# Altium PCB RightEar.PcbDoc
Units mm, origin at the board's own origin, x right, y up, seen from the top; angles counter-clockwise.
Board outline 72 x 100 mm, 2 copper layers (Top Layer, Bottom Layer); 1 components, 1 nets, 16 pads, 2 vias.
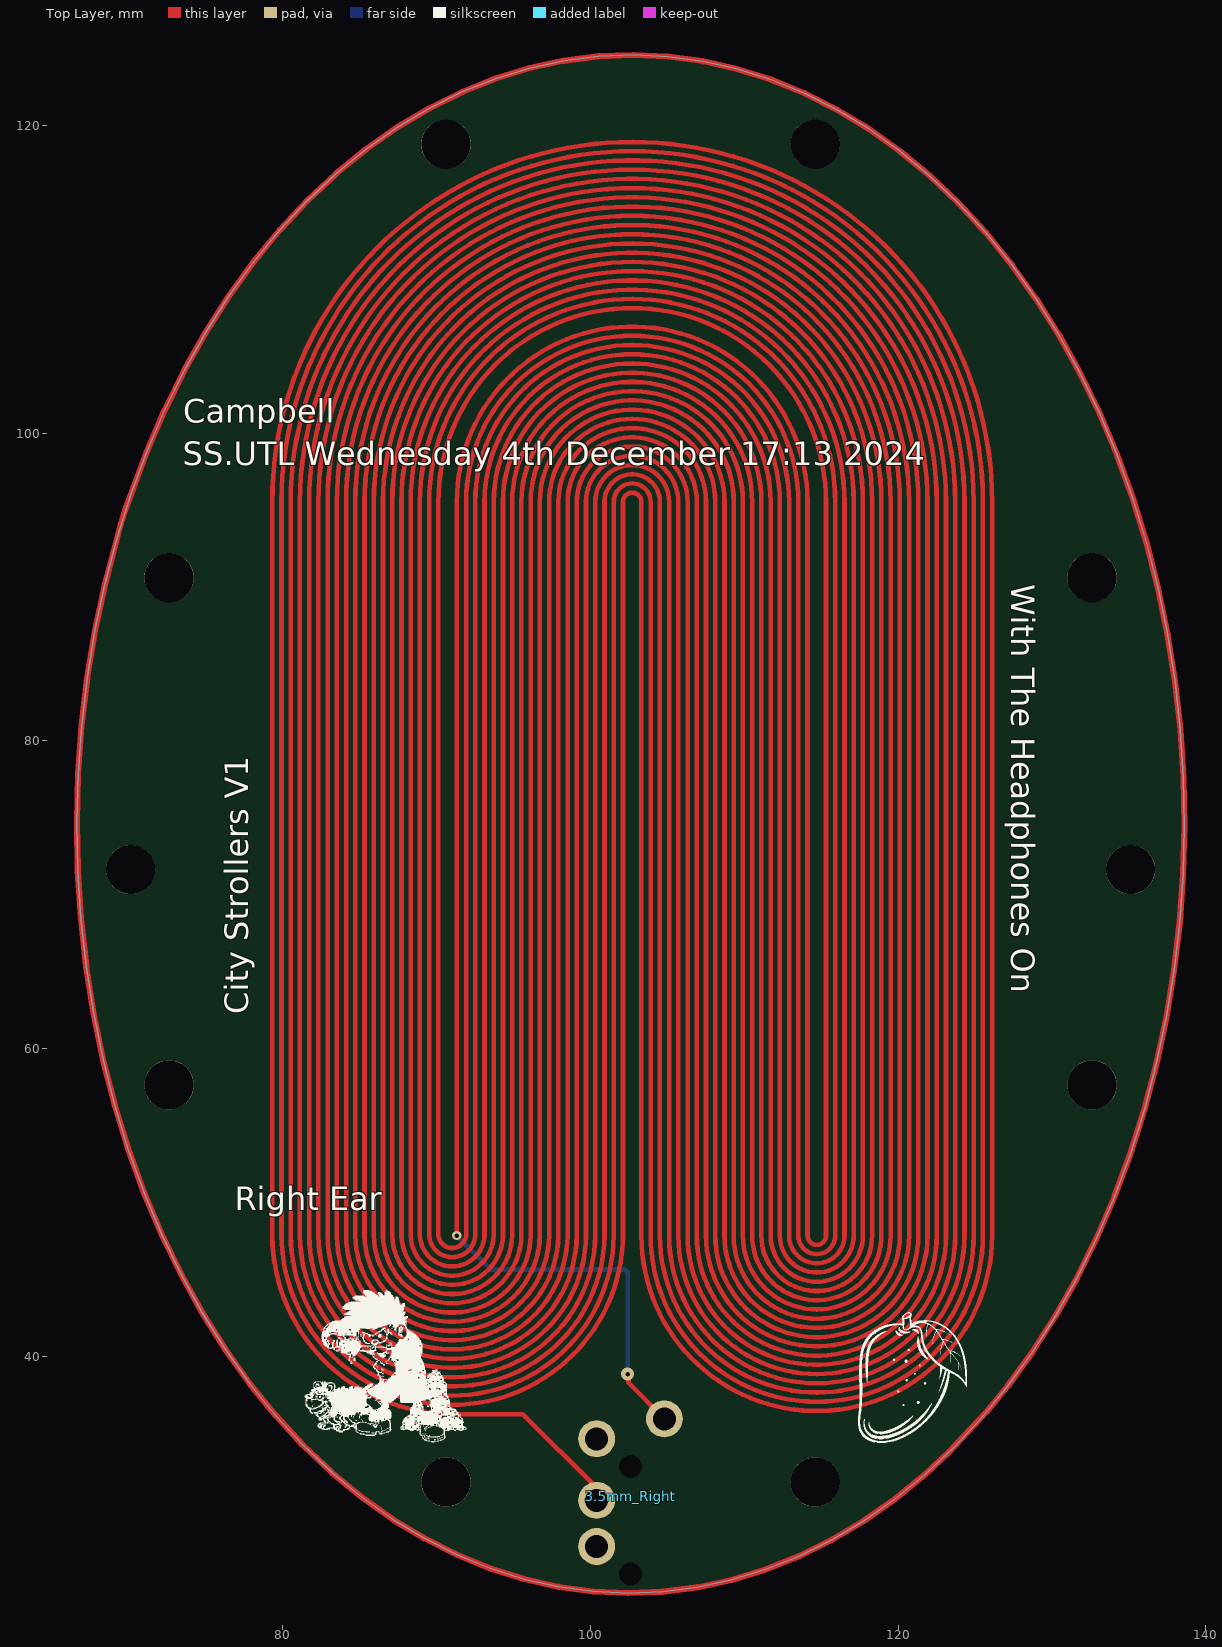
[diagram p0: Top Layer view]
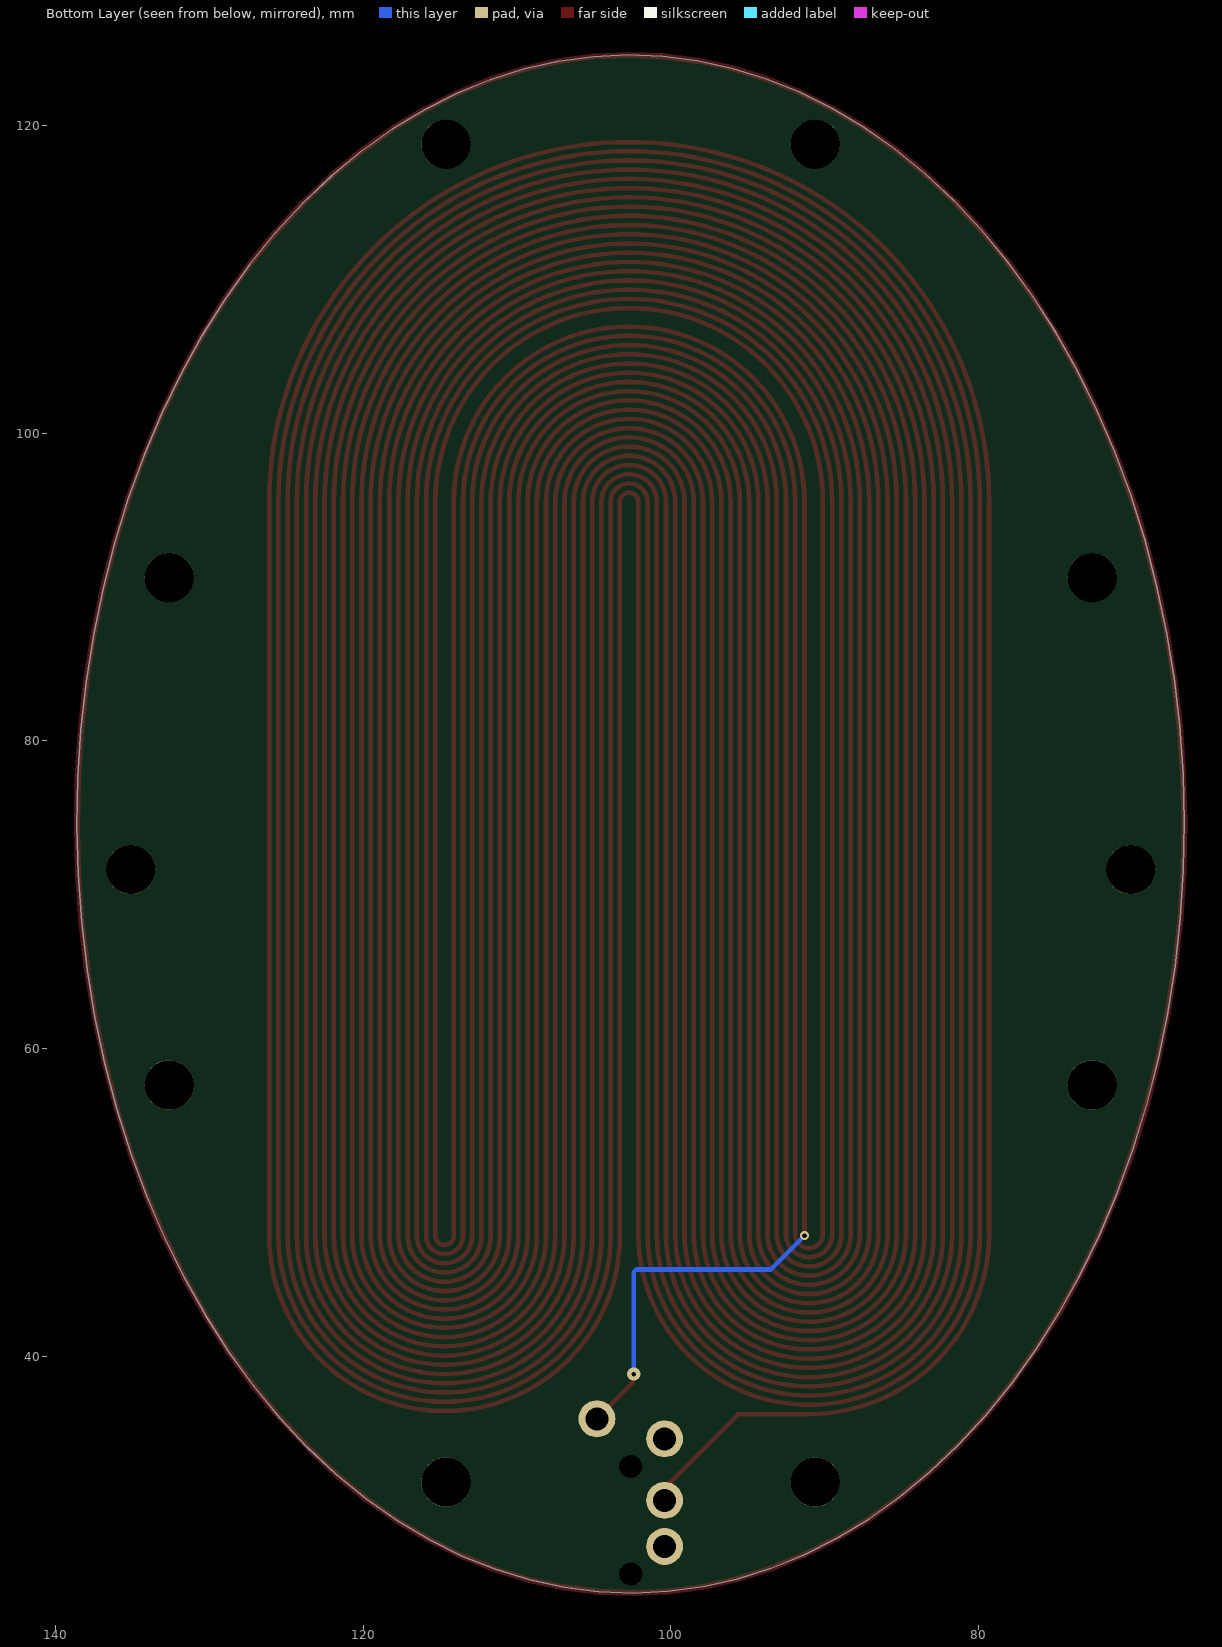
[diagram p1: Bottom Layer view, seen from below]

## Layer stack, top to bottom
Top Solder: solder mask 0.0102, Solder Resist, Dk 3.5
Top Layer: signal copper 0.0356
Dielectric 1: dielectric 0.32, FR-4, Dk 4.8
Bottom Layer: signal copper 0.0356
Bottom Solder: solder mask 0.0102, Solder Resist, Dk 3.5

## Board outline
74.758,42.813 76.246,40.452 77.837,38.225 79.526,36.142 81.306,34.211 83.171,32.439 85.112,30.833 87.122,29.4 89.193,28.145 91.317,27.074 93.486,26.19 95.69,25.497 97.922,24.998 100.173,24.694 102.433,24.587 104.694,24.678 106.946,24.966 109.182,25.45 111.391,26.127 113.566,26.996 115.698,28.052 117.778,29.292 119.798,30.711 121.75,32.304 123.627,34.063 125.42,35.981 127.124,38.053 128.731,40.268 130.235,42.619 131.63,45.096 132.91,47.69 134.071,50.389 135.107,53.184 136.015,56.064 136.792,59.017 137.433,62.031 137.937,65.094 138.302,68.196 138.526,71.322 138.608,74.461 138.548,77.601 138.346,80.729 138.003,83.832 137.52,86.9 136.9,89.918 136.144,92.876 135.256,95.762 134.239,98.564 133.097,101.272 131.835,103.874 130.458,106.361 128.97,108.723 127.379,110.949 125.69,113.032 123.91,114.964 122.045,116.736 120.104,118.342 118.094,119.775 116.023,121.029 113.899,122.101 111.73,122.985 109.526,123.678 107.294,124.177 105.043,124.48 102.783,124.587 100.522,124.496 98.27,124.208 96.034,123.725 93.825,123.047 91.65,122.179 89.518,121.122 87.438,119.882 85.418,118.463 83.466,116.871 81.589,115.112 79.796,113.193 78.092,111.122 76.485,108.906 74.981,106.555 73.586,104.078 72.306,101.485 71.145,98.785 70.109,95.99 69.201,93.11 68.424,90.158 67.783,87.144 67.279,84.08 66.914,80.979 66.69,77.852 66.608,74.713 66.668,71.573 66.87,68.446 67.213,65.342 67.696,62.275 68.316,59.256 69.072,56.298 69.96,53.412 70.977,50.61 72.119,47.902 73.381,45.3

## Design rules (kind name [scope] priority, off if disabled: settings)
Clearance [All] p1: gap=0.3 ignorepadtopadclearanceinfootprint=FALSE
HoleSize [All] p1: absolutevalues=TRUE maxlimit=6 minlimit=0.025 maxpercent=80.000 minpercent=20.000
PolygonConnect [All] p1: connectstyle=Relief reliefconductorwidth=0.254 reliefentries=4 polygonreliefangle="90 Angle" airgapwidth=0.254
RoutingVias [All] p1: holewidth=0.711 width=1.27 viastyle="Through Hole" minholewidth=0.711 minwidth=1.27 maxholewidth=0.711 maxwidth=1.27
SolderMaskExpansion [All] p1: expansion=0.102 istentingtop=FALSE
Width [All] p1: maxlimit=6 minlimit=0.3 preferedwidth=0.3
29 further rules are at their usual default settings.

## Components (designator, comment, footprint, x,y, rotation, side; value= is the part's Value field where it differs from the comment)
3.5mm_Right "PJ-320A" PCBComponent_1 105.6,36.42 r180 top

## Footprints (in the part's own frame and the unit in brackets; to place one, negate y for a bottom-side part, rotate by r counter-clockwise, add the part's x,y. Pads: shape width x height; smd on the part's side, far side on the other; paste and mask are expansions set on the pad)
PCBComponent_1 [mm]
  round 0 hole 1.5 unplated: 0(3,10.6) 0(3,3.6)
  round 2.4 hole 1.5: 1(0.8,0.5) 2(5.2,1.8) 3(5.2,5.8) 4(5.2,8.8)

## Part data
3.5mm_Right: "A thru hole 3.5mm TRRS audio jack connector"

## Free pads (board coordinates)
  round 3.2 hole 3.2 unplated: 9(70.103,71.627) 9(72.598,90.603) 9(72.603,57.627) 9(90.603,118.78) 9(90.603,31.809) 9(114.603,31.809) 9(114.603,118.78) 9(132.603,90.603) 9(132.608,57.627) 9(135.108,71.627)

## Via types
v1: diameter 0.6, hole 0.3, Top Layer to Bottom Layer, 1 vias
v2: diameter 0.85, hole 0.3, Top Layer to Bottom Layer, 1 vias

## Nets (pads, with @x,y where several pads share a name; then routed paths per layer and width w, separated by ;. In a path a pad name is that pad's centre, name@x,y a point inside that pad or via, vN(x,y) a via of type N, cw(c..) or ccw(c..) an arc to the next point about the centre after c; other vN are vias at no path point)
3.5mm_Right: 3.5mm_Right.1 3.5mm_Right.3 | length 5804.7
  Top Layer w0.3: v1(91.308,47.827) 91.308,95.527 cw(c102.708,95.527) 114.108,95.527 114.108,47.827 ccw(c114.708,47.827) 115.308,47.827 115.308,95.527 ccw(c102.708,95.527) 90.108,95.527 90.108,47.827 ccw(c91.008,47.927) 91.908,47.827 91.908,95.527 cw(c102.708,95.527) 113.508,95.527 113.508,47.827 ccw(c114.708,47.827) 115.908,47.827 115.908,95.527 ccw(c102.708,95.527) 89.508,95.527 89.508,47.827 ccw(c91.008,47.927) 92.508,47.827 92.508,95.527 cw(c102.708,95.527) 112.908,95.527 112.908,47.827 ccw(c114.708,47.827) 116.508,47.827 116.508,95.527 ccw(c102.708,95.527) 88.908,95.527 88.908,47.827 ccw(c91.008,47.927) 93.108,47.827 93.108,95.527 cw(c102.708,95.527) 112.308,95.527 112.308,47.827 ccw(c114.708,47.827) 117.108,47.827 117.108,95.527 ccw(c102.708,95.527) 88.308,95.527 88.308,47.827 ccw(c91.008,47.927) 93.708,47.827 93.708,95.527 cw(c102.708,95.527) 111.708,95.527 111.708,47.827 ccw(c114.708,47.827) 117.708,47.827 117.708,95.527 ccw(c102.708,95.527) 87.708,95.527 87.708,47.827 ccw(c91.008,47.927) 94.308,47.827 94.308,95.527 cw(c102.708,95.527) 111.108,95.527 111.108,47.827 ccw(c114.708,47.827) 118.308,47.827 118.308,95.527 ccw(c102.708,95.527) 87.108,95.527 87.108,47.827 ccw(c91.008,47.927) 94.908,47.827 94.908,95.527 cw(c102.708,95.527) 110.508,95.527 110.508,47.827 ccw(c114.708,47.827) 118.908,47.827 118.908,95.527 ccw(c102.708,95.527) 86.508,95.527 86.508,47.827 ccw(c91.008,47.927) 95.508,47.827 95.508,95.527 cw(c102.708,95.527) 109.908,95.527 109.908,47.827 ccw(c114.708,47.827) 119.508,47.827 119.508,95.527 ccw(c102.708,95.527) 85.908,95.527 85.908,47.827 ccw(c91.008,47.927) 96.108,47.827 96.108,95.527 cw(c102.708,95.527) 109.308,95.527 109.308,47.827 ccw(c114.708,47.827) 120.108,47.827 120.108,95.527 ccw(c102.708,95.527) 85.308,95.527 85.308,47.827 ccw(c91.008,47.927) 96.708,47.827 96.708,95.527 cw(c102.708,95.527) 108.708,95.527 108.708,47.827 ccw(c114.708,47.827) 120.708,47.827 120.708,95.527 ccw(c102.708,95.527) 84.708,95.527 84.708,47.827 ccw(c91.008,47.927) 97.308,47.827 97.308,95.527 cw(c102.708,95.527) 108.108,95.527 108.108,47.827 ccw(c114.708,47.827) 121.308,47.827 121.308,95.527 ccw(c102.708,95.527) 84.108,95.527 84.108,47.827 ccw(c91.008,47.927) 97.908,47.827 97.908,95.527 cw(c102.708,95.527) 107.508,95.527 107.508,47.827 ccw(c114.708,47.827) 121.908,47.827 121.908,95.527 ccw(c102.708,95.527) 83.508,95.527 83.508,47.827 ccw(c91.008,47.927) 98.508,47.827 98.508,95.527 cw(c102.708,95.527) 106.908,95.527 106.908,47.827 ccw(c114.708,47.827) 122.508,47.827 122.508,95.527 ccw(c102.708,95.527) 82.908,95.527 82.908,47.827 ccw(c91.008,47.927) 99.108,47.827 99.108,95.527 cw(c102.708,95.527) 106.308,95.527 106.308,47.827 ccw(c114.708,47.827) 123.108,47.827 123.108,95.527 ccw(c102.708,95.527) 82.308,95.527 82.308,47.827 ccw(c91.008,47.927) 99.708,47.827 99.708,95.527 cw(c102.708,95.527) 105.708,95.527 105.708,47.827 ccw(c114.708,47.827) 123.708,47.827 123.708,95.527 ccw(c102.708,95.527) 81.708,95.527 81.708,47.827 ccw(c91.008,47.927) 100.308,47.827 100.308,95.527 cw(c102.708,95.527) 105.108,95.527 105.108,47.827 ccw(c114.708,47.827) 124.308,47.827 124.308,95.527 ccw(c102.708,95.527) 81.108,95.527 81.108,47.827 ccw(c91.008,47.927) 100.908,47.827 100.908,95.527 cw(c102.708,95.527) 104.508,95.527 104.508,47.827 ccw(c114.708,47.827) 124.908,47.827 124.908,95.527 ccw(c102.708,95.527) 80.508,95.527 80.508,47.827 ccw(c91.008,47.927) 101.508,47.827 101.508,95.527 cw(c102.708,95.527) 103.908,95.527 103.908,47.827 ccw(c114.708,47.827) 125.508,47.827 125.508,95.527 ccw(c102.708,95.527) 79.908,95.527 79.908,47.827 ccw(c91.008,47.927) 102.108,47.827 102.108,95.527 cw(c102.708,95.527) 103.308,95.527 103.308,47.827 ccw(c114.708,47.827) 126.108,47.827 126.108,95.527 ccw(c102.708,95.527) 79.308,95.527 79.308,47.827 ccw(c91.008,47.927) 91.017,36.227 95.599,36.227 100.4,31.426 3.5mm_Right.3 ; v2(102.408,38.827) 102.469,38.766 102.469,38.251 3.5mm_Right.1
  Bottom Layer w0.3: v1(91.308,47.827) 93.508,45.627 102.232,45.627 102.408,45.451 v2(102.408,38.827)
pads on no net: 3.5mm_Right.0 3.5mm_Right.2 3.5mm_Right.4
copper on no net: | length 271.9
  Top Layer w0.4: 66.608,74.713 66.668,71.573 66.87,68.446 67.213,65.342 67.696,62.275 68.316,59.256 69.072,56.298 69.96,53.412 70.977,50.61 72.119,47.902 73.381,45.3 74.758,42.813 76.246,40.452 77.837,38.225 79.526,36.142 81.306,34.211 83.171,32.439 85.112,30.833 87.122,29.4 89.193,28.145 91.317,27.074 93.486,26.19 95.69,25.497 97.922,24.998 100.173,24.694 102.433,24.587 104.694,24.678 106.946,24.966 109.182,25.45 111.391,26.127 113.566,26.996 115.698,28.052 117.778,29.292 119.798,30.711 121.75,32.304 123.281,33.739 125.734,36.362 127.124,38.053 128.731,40.268 130.235,42.619 131.63,45.096 132.91,47.69 134.071,50.389 135.107,53.184 136.015,56.064 136.792,59.017 137.433,62.031 137.937,65.094 138.302,68.196 138.526,71.322 138.608,74.461 138.548,77.601 138.346,80.729 138.003,83.832 137.52,86.9 136.9,89.918 136.144,92.876 135.235,95.832 134.267,98.499 133.097,101.272 131.835,103.874 130.458,106.361 128.97,108.723 127.379,110.949 125.69,113.032 123.91,114.964 122.045,116.736 120.104,118.342 118.094,119.775 116.023,121.029 113.899,122.101 111.73,122.985 109.526,123.678 107.294,124.177 105.043,124.48 102.783,124.587 100.522,124.496 98.27,124.208 96.034,123.725 93.825,123.047 91.699,122.198 89.471,121.094 87.438,119.882 85.418,118.463 83.466,116.871 81.589,115.112 79.796,113.193 78.092,111.122 76.485,108.906 74.981,106.555 73.586,104.078 72.306,101.485 71.145,98.785 69.763,95.057 69.46,94.096 68.424,90.158 67.783,87.144 67.279,84.08 66.914,80.979 66.69,77.852 66.608,74.713

## Silkscreen, mask and mechanical layers (free items; w line width, h text height)
Top Overlay:
  drawing of 136 lines, arcs and shapes, not listed
  text "Campbell" at 73.513,100.667 h1.52
  text "SS.UTL Wednesday 4th December 17:13 2024" at 73.488,97.898 h1.52
  text "With The Headphones On" at 127.342,90.187 h1.52 r270
  text "City Strollers V1" at 77.746,62.211 h1.52 r90
  text "Right Ear" at 76.882,49.464 h1.52
Mechanical 1:
  circle w0.013: c90.603,31.77 r1.6
  circle w0.013: c70.103,71.638 r1.6
  circle w0.013: c72.603,57.618 r1.6
  circle w0.013: c114.603,31.77 r1.6
  circle w0.013: c132.603,57.618 r1.6
  circle w0.013: c90.603,118.74 r1.6
  circle w0.013: c114.603,118.74 r1.6
  circle w0.013: c135.103,71.638 r1.6
  circle w0.013: c132.603,90.603 r1.6
  circle w0.013: c72.603,90.603 r1.6
  lines w0.013: 115.108,47.627 115.108,95.627 ; 79.103,47.637 ccw(c90.603,47.637) 90.603,36.137 ccw(c90.603,47.637) 102.103,47.637 ; 79.103,47.637 90.103,47.637 90.103,95.637 79.103,95.637 ; 79.103,47.637 79.103,95.637 ; 79.103,47.637 102.103,47.637 ; 79.103,95.637 cw(c102.353,95.637) 102.353,118.887 102.853,118.887 cw(c102.853,95.637) 126.103,95.637 ; 79.103,95.637 126.103,95.637 ; 102.103,47.637 102.103,95.637 91.103,95.637 91.103,47.637 102.103,47.637 ; 103.103,47.637 ccw(c114.603,47.637) 114.603,36.137 ccw(c114.603,47.637) 126.103,47.637 ; 103.103,47.637 114.103,47.637 114.103,95.637 103.103,95.637 103.103,47.637 ; 103.103,47.637 126.103,47.637 ; 126.103,47.637 126.103,95.637 ; 126.103,47.637 115.103,47.637 115.103,95.637 126.103,95.637 ; 76.103,47.637 129.103,47.637 129.103,95.637 76.103,95.637 76.103,47.637 ; 100.008,24.525 106.208,24.525 106.208,36.725 100.008,36.725 100.008,24.525